# Altium PCB HC-001.PcbDoc
Units mil, origin at the board's own origin, x right, y up, seen from the top; angles counter-clockwise.
Board outline 715 x 1530 mil, 2 copper layers (Top Layer, Bottom Layer); 9 components, 20 nets, 16 pads, 0 vias.
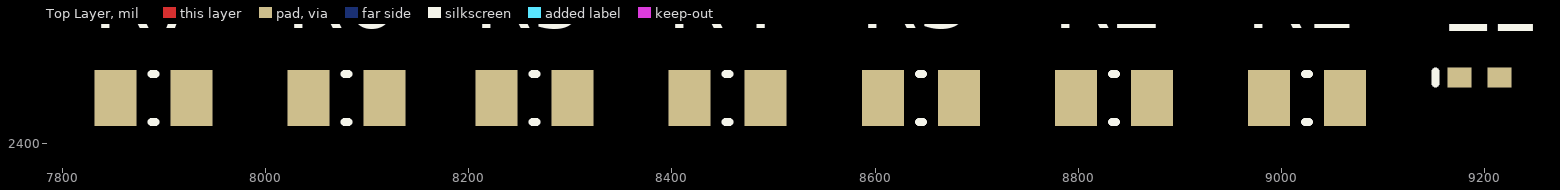
[diagram p0: Top Layer view]
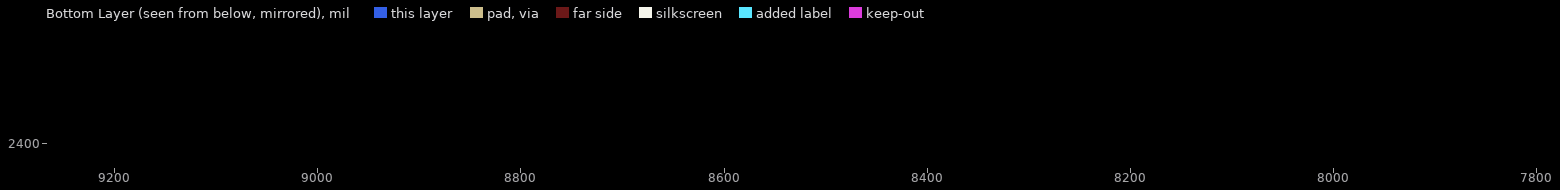
[diagram p1: Bottom Layer view, seen from below]

## Layer stack, top to bottom
Top Solder: solder mask 0.4, Solder Resist, Dk 3.5
Top Layer: signal copper 1.4
Dielectric 1: dielectric 12.6, FR-4, Dk 4.8
Bottom Layer: signal copper 1.4
Bottom Solder: solder mask 0.4, Solder Resist, Dk 3.5

## Board outline
3470,1580 4185,1580 4185,3110 3470,3110

## Design rules (kind name [scope] priority, off if disabled: settings)
Clearance [All] p1: gap=10 ignorepadtopadclearanceinfootprint=FALSE except(0: Arc-Hole Track-Hole SMDPad-Hole THPad-Hole Via-Hole Fill-Hole Poly-Hole Region-Hole Text-Hole)
PolygonConnect [All] p1: connectstyle=Relief reliefconductorwidth=10 reliefentries=4 polygonreliefangle="90 Angle" airgapwidth=10
RoomDefinition HC-001 [InComponentClass('HC-001')] p1: confinementstyle=ConfineIn formatcopy=TRUE lockcomponents=FALSE outline 7045,960 9255,960 9255,2590 7045,2590
RoutingVias [All] p1: holewidth=28 width=50 viastyle="Through Hole" minholewidth=28 minwidth=50 maxholewidth=28 maxwidth=50
SolderMaskExpansion [All] p1: expansion=4
Width [All] p1: maxlimit=10 minlimit=10 preferedwidth=10
30 further rules are at their usual default settings.

## Components (designator, comment, footprint, x,y, rotation, side; value= is the part's Value field where it differs from the comment)
L1 "Heater" 0402-A 9195,2465 r0 top
P1 "SFSD-30-28-G-12.00-S" SFSD-30-28 3910,2345 r90 top
R1 "44008RC" RESC0805(2012)_N 9025,2445 r0 top
R2 "44008RC" RESC0805(2012)_N 8835,2445 r0 top
R3 "44008RC" RESC0805(2012)_N 8645,2445 r0 top
R4 "44008RC" RESC0805(2012)_N 8455,2445 r0 top
R5 "44008RC" RESC0805(2012)_N 8265,2445 r0 top
R6 "44008RC" RESC0805(2012)_N 8080,2445 r0 top
R7 "44008RC" RESC0805(2012)_N 7890,2445 r0 top

## Footprints (in the part's own frame and the unit in brackets; to place one, negate y for a bottom-side part, rotate by r counter-clockwise, add the part's x,y. Pads: shape width x height; smd on the part's side, far side on the other; paste and mask are expansions set on the pad)
0402-A [mm] "Chip Inductor, Body 1.0x0.5mm, IPC High Density"
  rect 0.6x0.5 smd: 1(-0.5,0) 2(0.5,0)
  silkscreen extent -1.1,-0.15 -1.1,0.15, body extent -0.55,-0.3 0.55,0.3, height 0.55
RESC0805(2012)_N [mm] "Chip Resistor, Body 2.0x1.3mm, IPC Medium Density"
  rect 1.05x1.4 smd: 1(-0.95,0) 2(0.95,0)
  silkscreen extent -0.05,-0.6 0.05,0.6, body extent -1.1,-0.67 1.1,0.68, height 0.7
SFSD-30-28 [mil]
  body extent -758,-276 758,440, height 125

## Part data
L1: library part Inductor, Manufacturer=Minco, Manufacturer Part Number=HK5237R51.2L12A
P1: library part TFM-115-01-L-D-RE2-WT, "60 Position Cable Assembly Rectangular Socket to Individual Wire Leads 1.00' (304.80mm)", Color=Black, Manufacturer=Samtec, Manufacturer Part Number=SFSD-30-28-H-10.00-SR, Package Quantity=500, Supplier Part Number 1=200-SFSD3028H1000SR, Cable Length=0.254m, ComponentLink1Description=https://datasheet.ciiva.com/45/sfsdx-xx-xxx-xx-xx-xx-xx-xxx-mkt-45178.pdf?src-supplier=Digi-Key, ComponentLink1URL=https://datasheet.ciiva.com/45/sfsdx-xx-xxx-xx-xx-xx-xx-xxx-mkt-45178.pdf?src-supplier=Digi-Key, ComponentLink2Description=https://datasheet.ciiva.com/11065/sfss-11065544.pdf?src-supplier=Avnet, ComponentLink2URL=https://datasheet.ciiva.com/11065/sfss-11065544.pdf?src-supplier=Avnet, Connector Pitch=0.05inch, Connector Type="Wire Leads,Socket,Crimp,Discrete Wire", Contact Plating=Gold, Gender=Female, Length=0.833foot, Number of Positions=60, Number of Rows=2, Packaging=Bulk, Pricing 1="1=20.93000, 10=20.18000, 50=19.06000, 100=18.69000, 1000=18.32000, 10000=18.32000 (USD)", Radiation Hardening=No, RoHS=Yes, Shielding=Unshielded, Stock 1=0, Supplier 1=Mouser, System=Connector, Termination=Crimp, Wire/Cable Type=Discrete
R1 R2 R3 R4 R5 R6 R7: library part CMP-1013-00606-1, Case/Package=Radial, Manufacturer="Measurement Specialties", Max Operating Temperature=70°C, Min Operating Temperature=0°C, Package Quantity=100, Resistance=30kR, Tolerance=0.8%, ComponentLink1Description=http://www.mouser.com/ds/2/418/44008-710102.pdf?src-supplier=Mouser, ComponentLink1URL=http://www.mouser.com/ds/2/418/44008-710102.pdf?src-supplier=Mouser, ComponentLink2Description=http://www.meas-spec.com/downloads/44008.pdf?src-supplier=Future+Electronics, ComponentLink2URL=http://www.meas-spec.com/downloads/44008.pdf?src-supplier=Future+Electronics, Lead Diameter=2.4mm, Lead Free="Lead Free", Manufacturer Part Number=44008RC, Mount="Through Hole", Number of Pins=2, Packaging="Tape and Reel", Radiation Hardening=No, REACH SVHC="No SVHC", Stock 1=0, Supplier 1="Future Electronics", Supplier Part Number 1=44008RC, Termination=Radial

## Nets (pads, with @x,y where several pads share a name; then routed paths per layer and width w, separated by ;. In a path a pad name is that pad's centre, name@x,y a point inside that pad or via, vN(x,y) a via of type N, cw(c..) or ccw(c..) an arc to the next point about the centre after c; other vN are vias at no path point)
"Arrestment Htr Out": 
"Board1 Htr Out": L1.2
"Conning Tower Htr Out": 
"Gearbox Htr Out": 
Meter_Htr_Out: 
NetL1_1: L1.1
NetP1_1: R1.1
NetP1_3: R1.2
NetP1_5: R2.1
NetP1_7: R2.2
NetP1_9: R3.1
NetP1_11: R3.2
NetP1_13: R4.1
NetP1_15: R4.2
NetP1_17: R5.1
NetP1_19: R5.2
NetP1_21: R6.1
NetP1_23: R6.2
NetP1_25: R7.1
NetP1_27: R7.2